# Altium PCB QCW MMC PCBA.PcbDoc
Units mm, origin at the board's own origin, x right, y up, seen from the top; angles counter-clockwise.
Board outline 100 x 90 mm, 2 copper layers (Top Layer, Bottom Layer); 100 components, 58 nets, 264 pads, 84 vias.
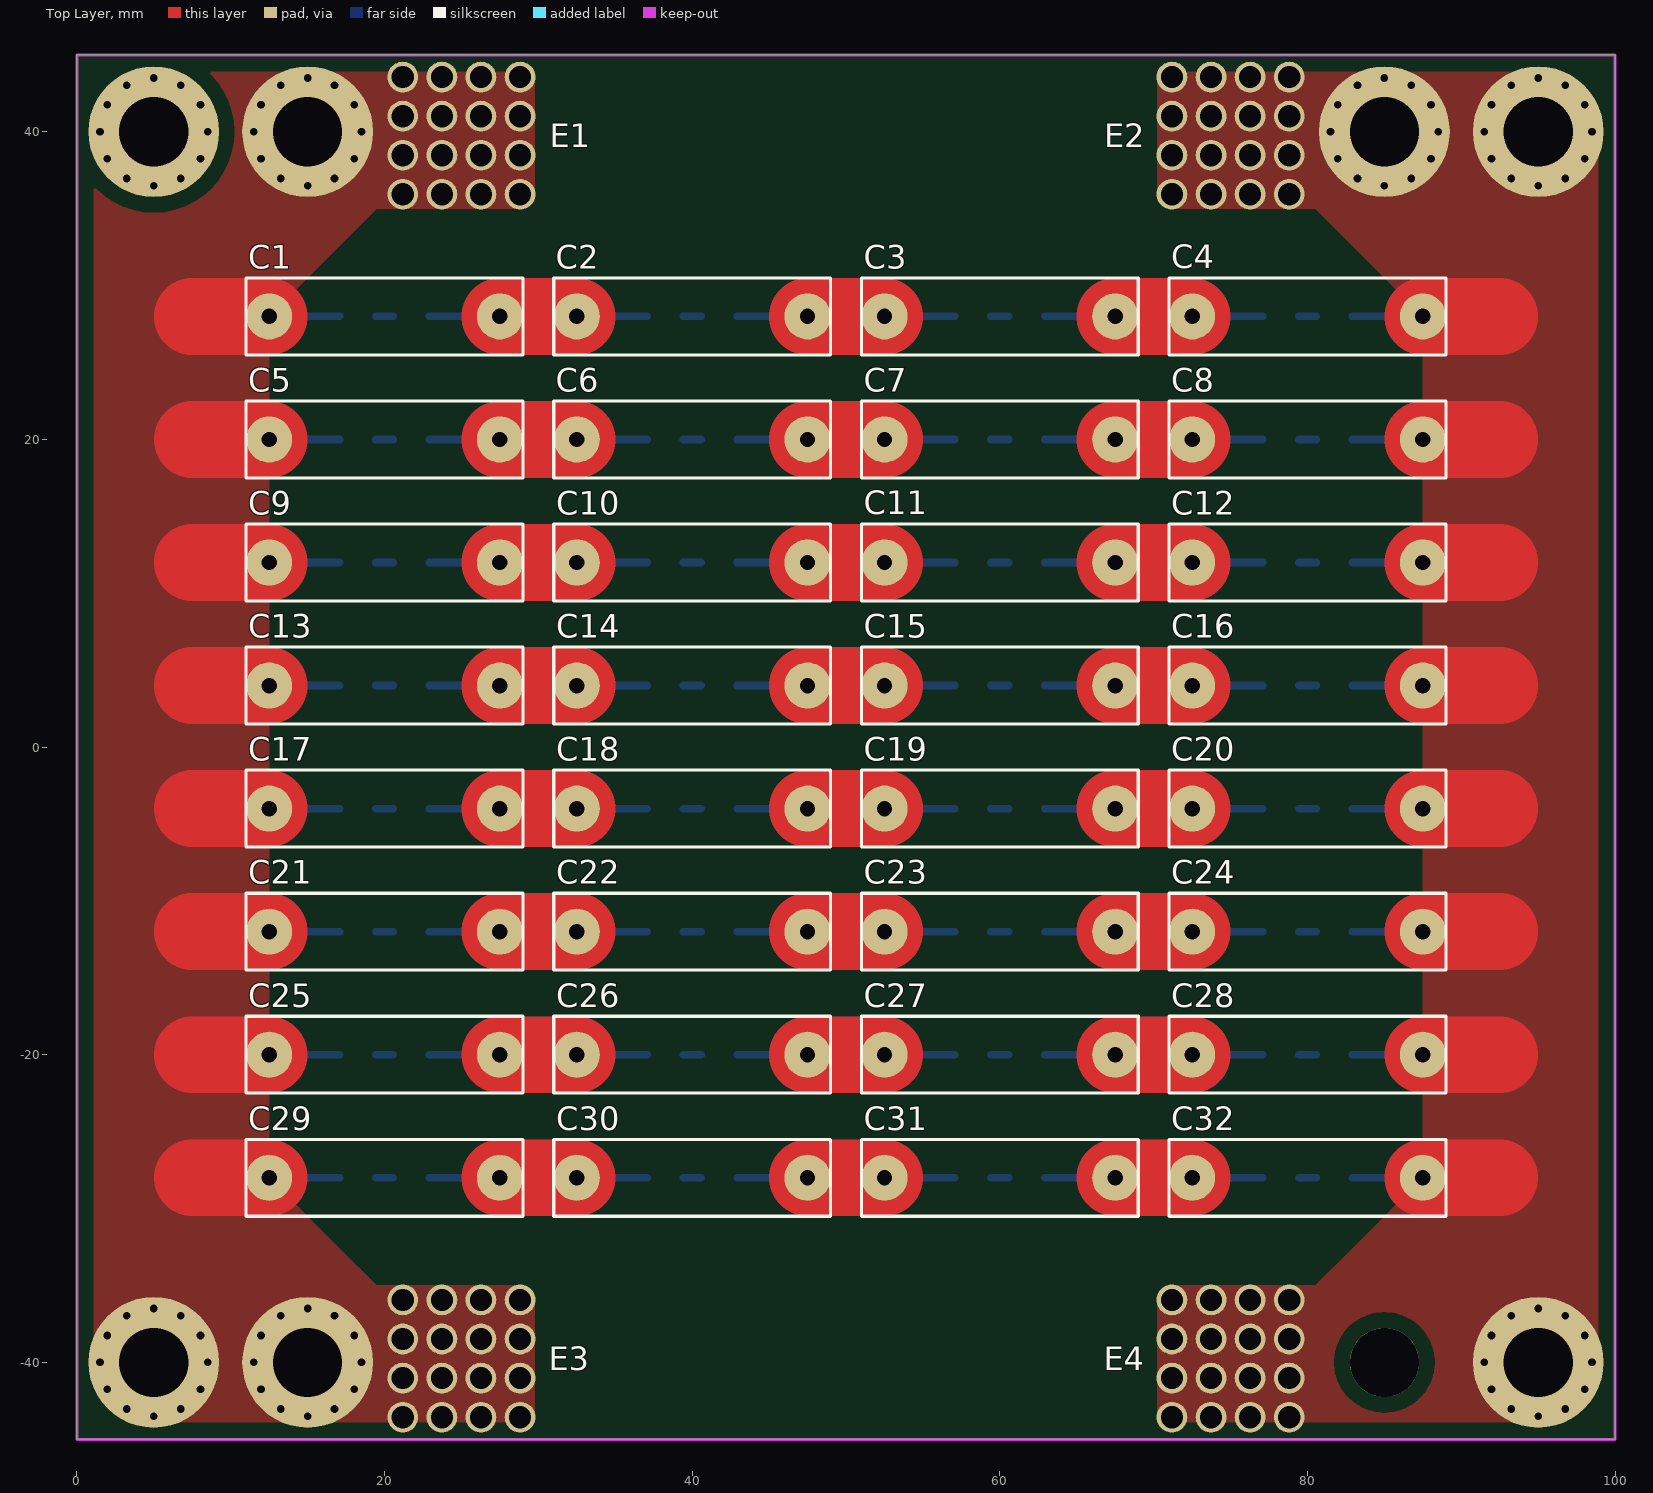
[diagram p0: Top Layer view]
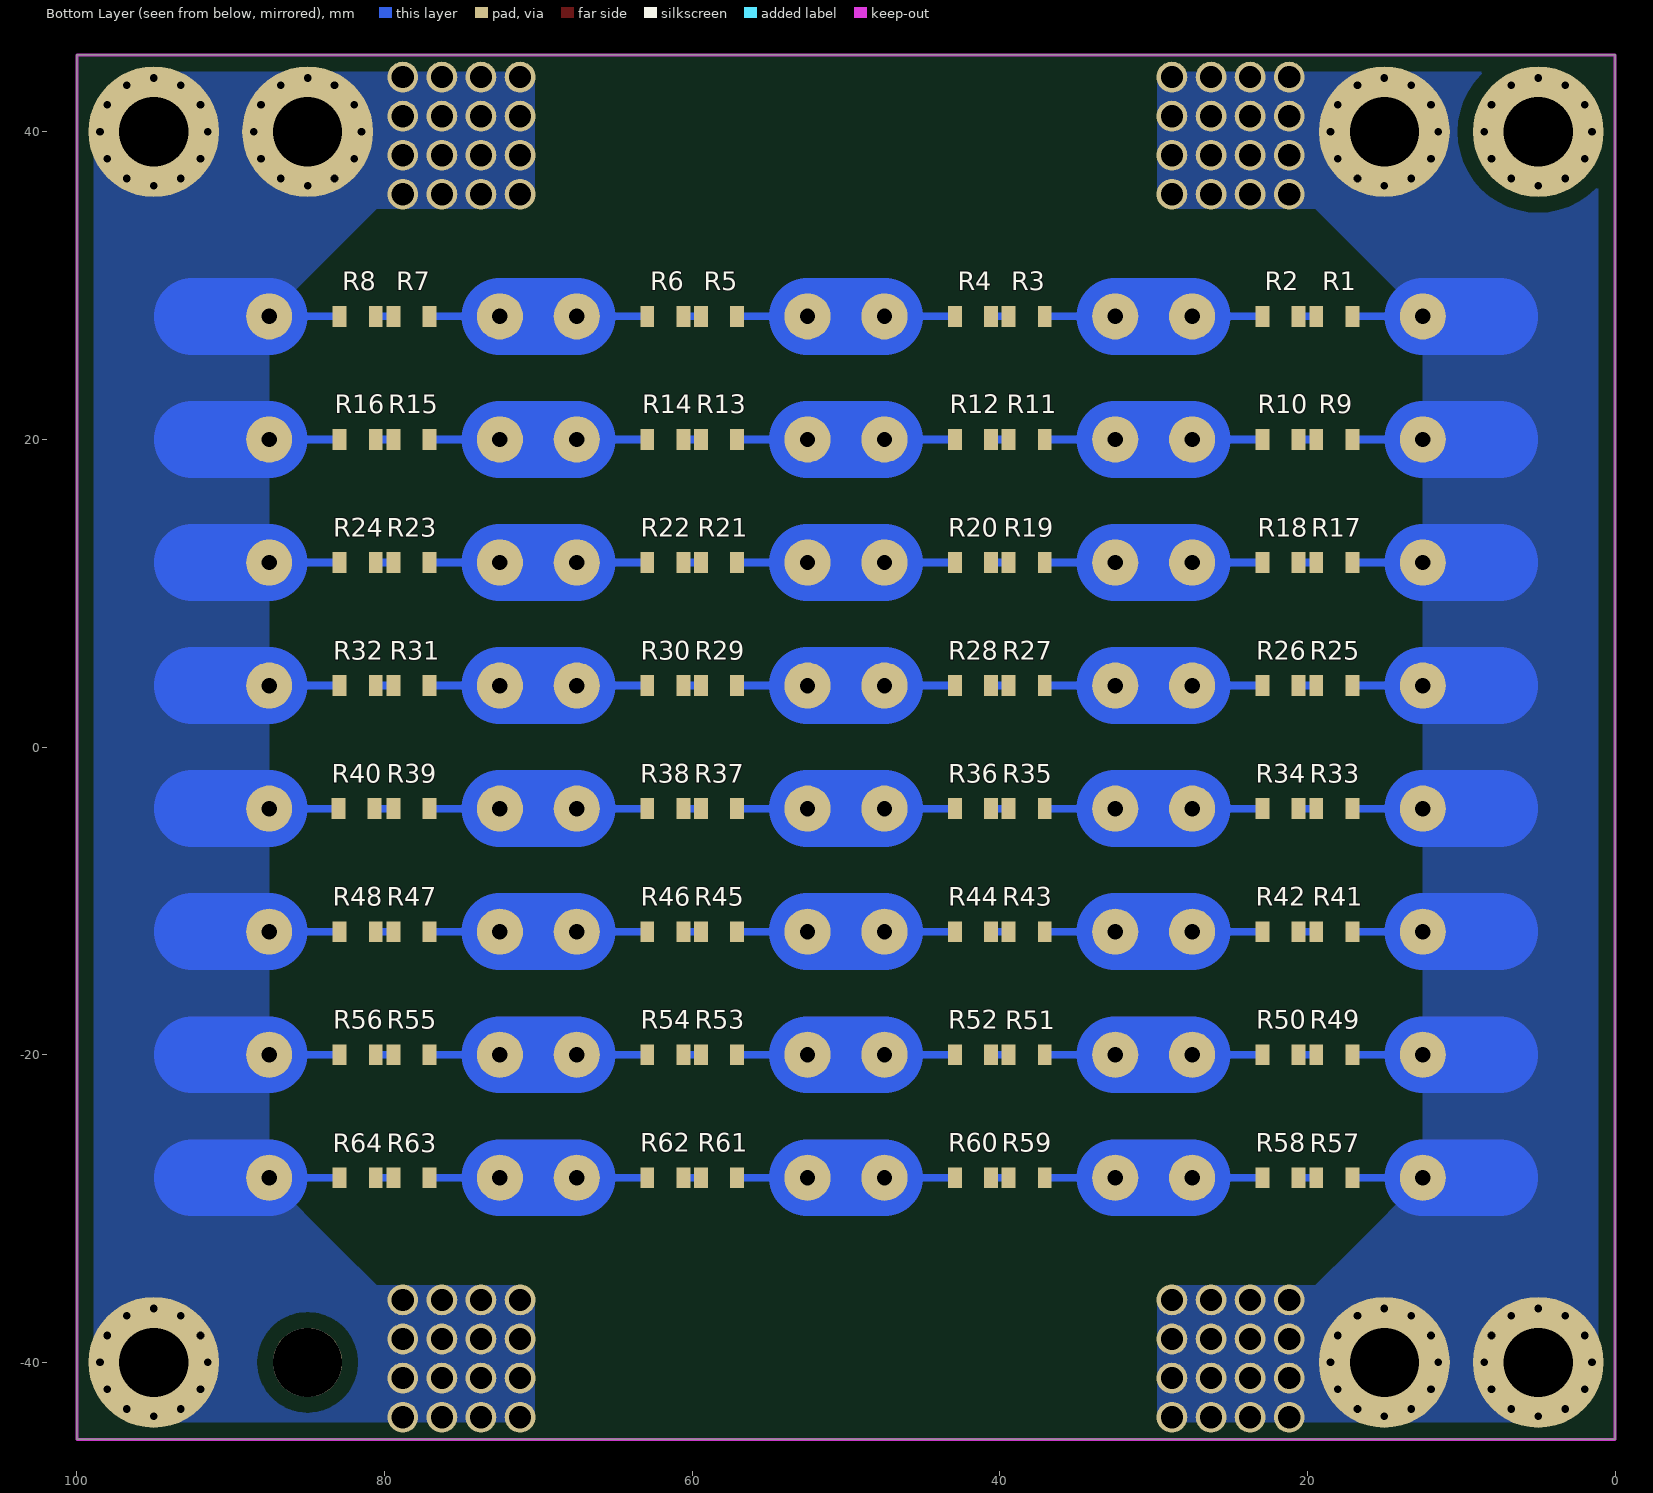
[diagram p1: Bottom Layer view, seen from below]
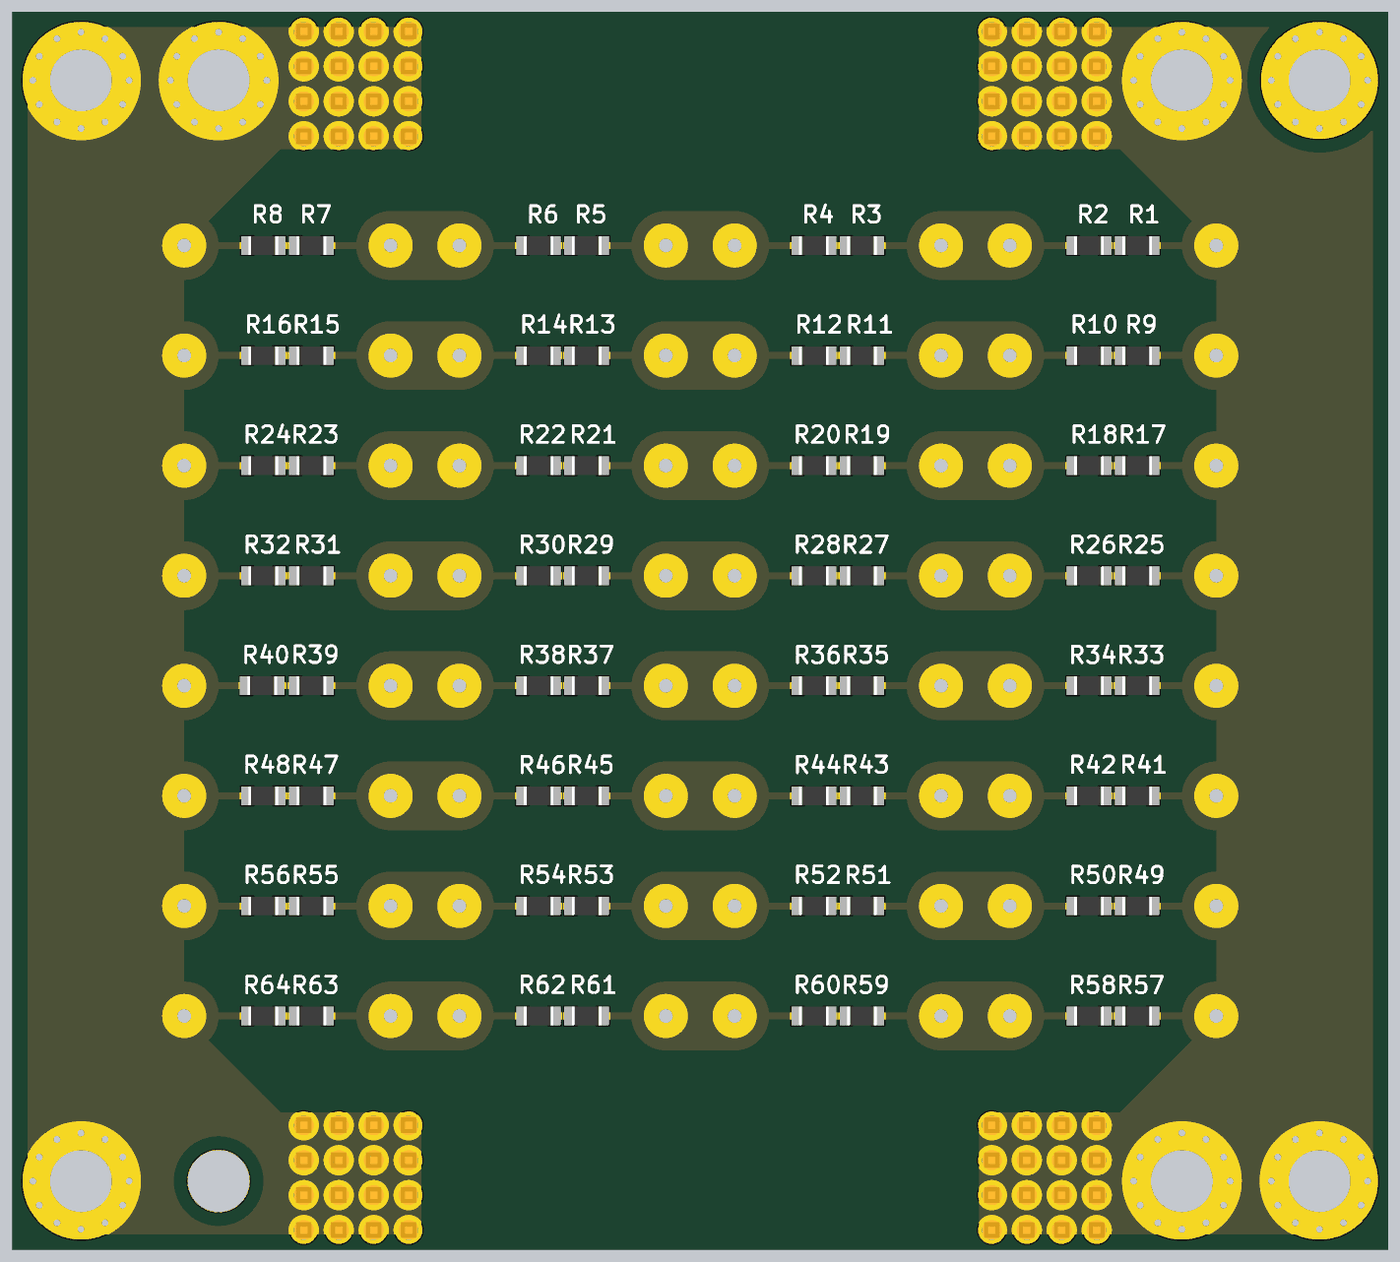
[diagram p2: 3D render of the assembled board from below, using the file's embedded part models]

## Layer stack, top to bottom
Top Solder: solder mask 0.0102, Solder Resist, Dk 3.5
Top Layer: signal copper 0.0356
Dielectric 1: dielectric 0.32, FR-4, Dk 4.8
Bottom Layer: signal copper 0.0356
Bottom Solder: solder mask 0.0102, Solder Resist, Dk 3.5

## Board outline
0,-45 100,-45 100,45 0,45

## Design rules (kind name [scope] priority, off if disabled: settings)
Clearance [InPolygon] p1: gap=1 ignorepadtopadclearanceinfootprint=FALSE
Clearance Clearance_1 [All] p2: gap=0.254 ignorepadtopadclearanceinfootprint=FALSE
PolygonConnect [All] p1: connectstyle=Direct reliefconductorwidth=0.254 reliefentries=4 polygonreliefangle="90 Angle" airgapwidth=0.254
RoutingVias [All] p1: holewidth=0.711 width=1.27 viastyle="Through Hole" minholewidth=0.711 minwidth=1.27 maxholewidth=0.711 maxwidth=1.27
SolderMaskExpansion [All] p1: expansion=0.102
Width [All] p1: maxlimit=10 minlimit=0.254 preferedwidth=0.254
30 further rules are at their usual default settings.

## Components (designator, comment, footprint, x,y, rotation, side; value= is the part's Value field where it differs from the comment)
C1 "B32672" "B32672 6n2 1600V" 20,28 r0 top value="6.2nF 1600V"
C2 "B32672" "B32672 6n2 1600V" 40,28 r0 top value="6.2nF 1600V"
C3 "B32672" "B32672 6n2 1600V" 60,28 r0 top value="6.2nF 1600V"
C4 "B32672" "B32672 6n2 1600V" 80,28 r0 top value="6.2nF 1600V"
C5 "B32672" "B32672 6n2 1600V" 20,20 r0 top value="6.2nF 1600V"
C6 "B32672" "B32672 6n2 1600V" 40,20 r0 top value="6.2nF 1600V"
C7 "B32672" "B32672 6n2 1600V" 60,20 r0 top value="6.2nF 1600V"
C8 "B32672" "B32672 6n2 1600V" 80,20 r0 top value="6.2nF 1600V"
C9 "B32672" "B32672 6n2 1600V" 20,12 r0 top value="6.2nF 1600V"
C10 "B32672" "B32672 6n2 1600V" 40,12 r0 top value="6.2nF 1600V"
C11 "B32672" "B32672 6n2 1600V" 60,12 r0 top value="6.2nF 1600V"
C12 "B32672" "B32672 6n2 1600V" 80,12 r0 top value="6.2nF 1600V"
C13 "B32672" "B32672 6n2 1600V" 20,4 r0 top value="6.2nF 1600V"
C14 "B32672" "B32672 6n2 1600V" 40,4 r0 top value="6.2nF 1600V"
C15 "B32672" "B32672 6n2 1600V" 60,4 r0 top value="6.2nF 1600V"
C16 "B32672" "B32672 6n2 1600V" 80,4 r0 top value="6.2nF 1600V"
C17 "B32672" "B32672 6n2 1600V" 20,-4 r0 top value="6.2nF 1600V"
C18 "B32672" "B32672 6n2 1600V" 40,-4 r0 top value="6.2nF 1600V"
C19 "B32672" "B32672 6n2 1600V" 60,-4 r0 top value="6.2nF 1600V"
C20 "B32672" "B32672 6n2 1600V" 80,-4 r0 top value="6.2nF 1600V"
C21 "B32672" "B32672 6n2 1600V" 20,-12 r0 top value="6.2nF 1600V"
C22 "B32672" "B32672 6n2 1600V" 40,-12 r0 top value="6.2nF 1600V"
C23 "B32672" "B32672 6n2 1600V" 60,-12 r0 top value="6.2nF 1600V"
C24 "B32672" "B32672 6n2 1600V" 80,-12 r0 top value="6.2nF 1600V"
C25 "B32672" "B32672 6n2 1600V" 20,-20 r0 top value="6.2nF 1600V"
C26 "B32672" "B32672 6n2 1600V" 40,-20 r0 top value="6.2nF 1600V"
C27 "B32672" "B32672 6n2 1600V" 60,-20 r0 top value="6.2nF 1600V"
C28 "B32672" "B32672 6n2 1600V" 80,-20 r0 top value="6.2nF 1600V"
C29 "B32672" "B32672 6n2 1600V" 20,-28 r0 top value="6.2nF 1600V"
C30 "B32672" "B32672 6n2 1600V" 40,-28 r0 top value="6.2nF 1600V"
C31 "B32672" "B32672 6n2 1600V" 60,-28 r0 top value="6.2nF 1600V"
C32 "B32672" "B32672 6n2 1600V" 80,-28 r0 top value="6.2nF 1600V"
E1 "7461111" "7461111_HAL Surface" 25,39.75 r90 top
E2 "7461111" "7461111_HAL Surface" 75,39.75 r90 top
E3 "7461111" "7461111_HAL Surface" 25,-39.75 r270 top
E4 "7461111" "7461111_HAL Surface" 75,-39.75 r270 top
R1 "HV 1206 Resistor" RES_1206_HV 18.25,28 r0 bottom value=5.1M
R2 "HV 1206 Resistor" RES_1206_HV 21.75,28 r0 bottom value=5.1M
R3 "HV 1206 Resistor" RES_1206_HV 38.25,28 r0 bottom value=5.1M
R4 "HV 1206 Resistor" RES_1206_HV 41.75,28 r0 bottom value=5.1M
R5 "HV 1206 Resistor" RES_1206_HV 58.25,28 r0 bottom value=5.1M
R6 "HV 1206 Resistor" RES_1206_HV 61.75,28 r0 bottom value=5.1M
R7 "HV 1206 Resistor" RES_1206_HV 78.25,28 r0 bottom value=5.1M
R8 "HV 1206 Resistor" RES_1206_HV 81.75,28 r0 bottom value=5.1M
R9 "HV 1206 Resistor" RES_1206_HV 18.25,20 r0 bottom value=5.1M
R10 "HV 1206 Resistor" RES_1206_HV 21.75,20 r0 bottom value=5.1M
R11 "HV 1206 Resistor" RES_1206_HV 38.25,20 r0 bottom value=5.1M
R12 "HV 1206 Resistor" RES_1206_HV 41.75,20 r0 bottom value=5.1M
R13 "HV 1206 Resistor" RES_1206_HV 58.25,20 r0 bottom value=5.1M
R14 "HV 1206 Resistor" RES_1206_HV 61.75,20 r0 bottom value=5.1M
R15 "HV 1206 Resistor" RES_1206_HV 78.25,20 r0 bottom value=5.1M
R16 "HV 1206 Resistor" RES_1206_HV 81.75,20 r0 bottom value=5.1M
R17 "HV 1206 Resistor" RES_1206_HV 18.25,12 r0 bottom value=5.1M
R18 "HV 1206 Resistor" RES_1206_HV 21.75,12 r0 bottom value=5.1M
R19 "HV 1206 Resistor" RES_1206_HV 38.25,12 r0 bottom value=5.1M
R20 "HV 1206 Resistor" RES_1206_HV 41.75,12 r0 bottom value=5.1M
R21 "HV 1206 Resistor" RES_1206_HV 58.25,12 r0 bottom value=5.1M
R22 "HV 1206 Resistor" RES_1206_HV 61.75,12 r0 bottom value=5.1M
R23 "HV 1206 Resistor" RES_1206_HV 78.25,12 r0 bottom value=5.1M
R24 "HV 1206 Resistor" RES_1206_HV 81.75,12 r0 bottom value=5.1M
R25 "HV 1206 Resistor" RES_1206_HV 18.25,4 r0 bottom value=5.1M
R26 "HV 1206 Resistor" RES_1206_HV 21.75,4 r0 bottom value=5.1M
R27 "HV 1206 Resistor" RES_1206_HV 38.25,4 r0 bottom value=5.1M
R28 "HV 1206 Resistor" RES_1206_HV 41.75,4 r0 bottom value=5.1M
R29 "HV 1206 Resistor" RES_1206_HV 58.25,4 r0 bottom value=5.1M
R30 "HV 1206 Resistor" RES_1206_HV 61.75,4 r0 bottom value=5.1M
R31 "HV 1206 Resistor" RES_1206_HV 78.25,4 r0 bottom value=5.1M
R32 "HV 1206 Resistor" RES_1206_HV 81.75,4 r0 bottom value=5.1M
R33 "HV 1206 Resistor" RES_1206_HV 18.25,-4 r0 bottom value=5.1M
R34 "HV 1206 Resistor" RES_1206_HV 21.75,-4 r0 bottom value=5.1M
R35 "HV 1206 Resistor" RES_1206_HV 38.25,-4 r0 bottom value=5.1M
R36 "HV 1206 Resistor" RES_1206_HV 41.75,-4 r0 bottom value=5.1M
R37 "HV 1206 Resistor" RES_1206_HV 58.25,-4 r0 bottom value=5.1M
R38 "HV 1206 Resistor" RES_1206_HV 61.75,-4 r0 bottom value=5.1M
R39 "HV 1206 Resistor" RES_1206_HV 78.25,-4 r0 bottom value=5.1M
R40 "HV 1206 Resistor" RES_1206_HV 81.825,-4 r0 bottom value=5.1M
R41 "HV 1206 Resistor" RES_1206_HV 18.25,-12 r0 bottom value=5.1M
R42 "HV 1206 Resistor" RES_1206_HV 21.75,-12 r0 bottom value=5.1M
R43 "HV 1206 Resistor" RES_1206_HV 38.25,-12 r0 bottom value=5.1M
R44 "HV 1206 Resistor" RES_1206_HV 41.75,-12 r0 bottom value=5.1M
R45 "HV 1206 Resistor" RES_1206_HV 58.25,-12 r0 bottom value=5.1M
R46 "HV 1206 Resistor" RES_1206_HV 61.75,-12 r0 bottom value=5.1M
R47 "HV 1206 Resistor" RES_1206_HV 78.25,-12 r0 bottom value=5.1M
R48 "HV 1206 Resistor" RES_1206_HV 81.75,-12 r0 bottom value=5.1M
R49 "HV 1206 Resistor" RES_1206_HV 18.25,-20 r0 bottom value=5.1M
R50 "HV 1206 Resistor" RES_1206_HV 21.75,-20 r0 bottom value=5.1M
R51 "HV 1206 Resistor" RES_1206_HV 38.25,-20 r0 bottom value=5.1M
R52 "HV 1206 Resistor" RES_1206_HV 41.75,-20 r0 bottom value=5.1M
R53 "HV 1206 Resistor" RES_1206_HV 58.25,-20 r0 bottom value=5.1M
R54 "HV 1206 Resistor" RES_1206_HV 61.75,-20 r0 bottom value=5.1M
R55 "HV 1206 Resistor" RES_1206_HV 78.25,-20 r0 bottom value=5.1M
R56 "HV 1206 Resistor" RES_1206_HV 81.75,-20 r0 bottom value=5.1M
R57 "HV 1206 Resistor" RES_1206_HV 18.25,-28 r0 bottom value=5.1M
R58 "HV 1206 Resistor" RES_1206_HV 21.75,-28 r0 bottom value=5.1M
R59 "HV 1206 Resistor" RES_1206_HV 38.25,-28 r0 bottom value=5.1M
R60 "HV 1206 Resistor" RES_1206_HV 41.75,-28 r0 bottom value=5.1M
R61 "HV 1206 Resistor" RES_1206_HV 58.25,-28 r0 bottom value=5.1M
R62 "HV 1206 Resistor" RES_1206_HV 61.75,-28 r0 bottom value=5.1M
R63 "HV 1206 Resistor" RES_1206_HV 78.25,-28 r0 bottom value=5.1M
R64 "HV 1206 Resistor" RES_1206_HV 81.75,-28 r0 bottom value=5.1M

## Footprints (in the part's own frame and the unit in brackets; to place one, negate y for a bottom-side part, rotate by r counter-clockwise, add the part's x,y. Pads: shape width x height; smd on the part's side, far side on the other; paste and mask are expansions set on the pad)
"7461111_HAL Surface" [mm] "M4, thr 5mm"
  round 2 hole 1.45: 1(-3.81,-3.81) 1(-3.81,-1.27) 1(-3.81,1.27) 1(-3.81,3.81) 1(-1.27,3.81) 1(-1.27,-1.27) 1(-1.27,1.27) 1(-1.27,-3.81) 1(1.27,3.81) 1(1.27,-1.27) 1(1.27,1.27) 1(1.27,-3.81) 1(3.81,-3.81) 1(3.81,-1.27) 1(3.81,1.27) 1(3.81,3.81)
  body extent -4.5,-4.5 4.5,4.5, height 14
"B32672 6n2 1600V" [mm]
  round 3 hole 1: 1(-7.5,0) 2(7.5,0)
  silkscreen extent -9,-2.5 9,2.5, body extent -9,-2.5 9,2.5, height 10.5
RES_1206_HV [mm] "Chip Resistor, 2-Leads, Body 2.00x1.25mm, IPC Medium Density"
  rect 0.9x1.35 smd: 1(-1.175,0) 2(1.175,0)
  body extent -1.07,-0.67 1.07,0.67, height 0.65

## Part data
C1 C2 C3 C4 C5 C6 C7 C8 C9 C10 C11 C12 C13 C14 C15 C16 C17 C18 C19 C20 C21 C22 C23 C24 C25 C26 C27 C28 C29 C30 C31 C32: library part Cap, "Capacitor", LatestRevisionDate=17-Jul-2002, LatestRevisionNote="Re-released for DXP Platform.", PackageDescription="Radial Cap, Thru-Hole; 2 Leads; 0.3 in Pin Spacing", PackageReference=RAD-0.3, Published=8-Jun-2000, Publisher="Altium Limited"
E1 E2 E3 E4: library part "WP-RAFU,  7461111", "WP-RAFU 90° with Full Plain Pin Plate, M4, thr 5mm", Manufacturer="Wurth Elektronik", ComponentLink1Description=Manufacturer, ComponentLink1URL=http://www.we-online.de, ComponentLink2Description=Datasheet, ComponentLink2URL=http://katalog.we-online.de/em/datasheet/7461111.pdf, Created by="Baojun Chen", Created Date=Dec.2015, partNo=7461111
R1 R2 R3 R4 R5 R6 R7 R8 R9 R10 R11 R12 R13 R14 R15 R16 R17 R18 R19 R20 R21 R22 R23 R24 R25 R26 R27 R28 R29 R30 R31 R32 R33 R34 R35 R36 R37 R38 R39 R40 R41 R42 R43 R44 R45 R46 R47 R48 R49 R50 R51 R52 R53 R54 R55 R56 R57 R58 R59 R60 R61 R62 R63 R64: library part Res3, "Resistor", LatestRevisionDate=29-May-2009, LatestRevisionNote="IPC-7351 Footprint Added.", PackageDescription="Chip Resistor", PackageReference=J1-0603, Published=8-Jun-2000, Publisher="Altium Limited"

## Free pads (board coordinates)
  round 8.5 hole 4.5: 0(5,-40) 0(5,40) 0(15,-40) 0(15,40) 0(85,40) 0(95,-40) 0(95,40)
  round 4.5 hole 4.5: 0(85,-40)

## Via types
v1: diameter 1, hole 0.5, Top Layer to Bottom Layer, 84 vias

## Nets (pads, with @x,y where several pads share a name; then routed paths per layer and width w, separated by ;. In a path a pad name is that pad's centre, name@x,y a point inside that pad or via, vN(x,y) a via of type N, cw(c..) or ccw(c..) an arc to the next point about the centre after c; other vN are vias at no path point)
MMC_A: C1.1 C5.1 C9.1 C13.1 C17.1 C21.1 C25.1 C29.1 E1.1 E3.1 pad.0@5,-40 pad.0@15,40 pad.0@15,-40 R1.1 R9.1 R17.1 R25.1 R33.1 R41.1 R49.1 R57.1 | length 96.6
  Top Layer w5: 7.5,-28 C29.1 ; 7.5,-20 C25.1 ; 7.5,-12 C21.1 ; 7.5,-4 C17.1 ; 7.5,4 C13.1 ; 7.5,12 C9.1 ; 7.5,20 C5.1 ; 7.5,28 C1.1
  Bottom Layer w0.5: 15,-28 R57.1 ; 15,-20 R49.1 ; 15,-12 R41.1 ; 15,-4 R33.1 ; 15,4 R25.1 ; 15,12 R17.1 ; 15,20 R9.1 ; 15,28 R1.1
  Bottom Layer w5: 7.5,-28 C29.1 ; 7.5,-20 C25.1 ; 7.5,-12 C21.1 ; 7.5,-4 C17.1 ; 7.5,4 C13.1 ; 7.5,12 C9.1 ; 7.5,20 C5.1 ; 7.5,28 C1.1
  other v1: 5,-43.5 15,-43.5 3.25,-43.031 6.75,-43.031 13.25,-43.031 16.75,-43.031 1.969,-41.75 8.031,-41.75 11.969,-41.75 18.031,-41.75 1.5,-40 8.5,-40 11.5,-40 18.5,-40 1.969,-38.25 8.031,-38.25 11.969,-38.25 18.031,-38.25 3.25,-36.969 6.75,-36.969 13.25,-36.969 16.75,-36.969 5,-36.5 15,-36.5 15,36.5 13.25,36.969 16.75,36.969 11.969,38.25 18.031,38.25 11.5,40 18.5,40 11.969,41.75 18.031,41.75 13.25,43.031 16.75,43.031 15,43.5
MMC_B: C4.2 C8.2 C12.2 C16.2 C20.2 C24.2 C28.2 C32.2 E2.1 E4.1 pad.0@85,40 pad.0@95,40 pad.0@95,-40 R8.2 R16.2 R24.2 R32.2 R40.2 R48.2 R56.2 R64.2 | length 96.6
  Top Layer w5: C32.2 92.5,-28 ; C28.2 92.5,-20 ; C24.2 92.5,-12 ; C20.2 92.5,-4 ; C16.2 92.5,4 ; C12.2 92.5,12 ; C8.2 92.5,20 ; C4.2 92.5,28
  Bottom Layer w0.5: R64.2 85,-28 ; R56.2 85,-20 ; R48.2 85,-12 ; R40.2@82.925,-4 85,-4 ; R32.2 85,4 ; R24.2 85,12 ; R16.2 85,20 ; R8.2 85,28
  Bottom Layer w5: C32.2 92.5,-28 ; C28.2 92.5,-20 ; C24.2 92.5,-12 ; C20.2 92.5,-4 ; C16.2 92.5,4 ; C12.2 92.5,12 ; C8.2 92.5,20 ; C4.2 92.5,28
  other v1: 95,-43.5 93.25,-43.031 96.75,-43.031 91.969,-41.75 98.031,-41.75 91.5,-40 98.5,-40 91.969,-38.25 98.031,-38.25 93.25,-36.969 96.75,-36.969 95,-36.5 85,36.5 95,36.5 83.25,36.969 86.75,36.969 93.25,36.969 96.75,36.969 81.969,38.25 88.031,38.25 91.969,38.25 98.031,38.25 81.5,40 88.5,40 91.5,40 98.5,40 81.969,41.75 88.031,41.75 91.969,41.75 98.031,41.75 83.25,43.031 86.75,43.031 93.25,43.031 96.75,43.031 85,43.5 95,43.5
NetC1_2: C1.2 C2.1 R2.2 R3.1 | length 14.1
  Top Layer w5: C1.2 C2.1
  Bottom Layer w0.5: R2.2 25,28 ; 35,28 R3.1
  Bottom Layer w5: C1.2 C2.1
NetC2_2: C2.2 C3.1 R4.2 R5.1 | length 14.1
  Top Layer w5: C2.2 C3.1
  Bottom Layer w0.5: R4.2 45,28 ; 55,28 R5.1
  Bottom Layer w5: C2.2 C3.1
NetC3_2: C3.2 C4.1 R6.2 R7.1 | length 14.1
  Top Layer w5: C3.2 C4.1
  Bottom Layer w0.5: R6.2 65,28 ; 75,28 R7.1
  Bottom Layer w5: C3.2 C4.1
NetC5_2: C5.2 C6.1 R10.2 R11.1 | length 14.1
  Top Layer w5: C5.2 C6.1
  Bottom Layer w0.5: R10.2 25,20 ; 35,20 R11.1
  Bottom Layer w5: C5.2 C6.1
NetC6_2: C6.2 C7.1 R12.2 R13.1 | length 14.1
  Top Layer w5: C6.2 C7.1
  Bottom Layer w0.5: R12.2 45,20 ; 55,20 R13.1
  Bottom Layer w5: C6.2 C7.1
NetC7_2: C7.2 C8.1 R14.2 R15.1 | length 14.1
  Top Layer w5: C7.2 C8.1
  Bottom Layer w0.5: R14.2 65,20 ; 75,20 R15.1
  Bottom Layer w5: C7.2 C8.1
NetC9_2: C9.2 C10.1 R18.2 R19.1 | length 14.1
  Top Layer w5: C9.2 C10.1
  Bottom Layer w0.5: R18.2 25,12 ; 35,12 R19.1
  Bottom Layer w5: C9.2 C10.1
NetC10_2: C10.2 C11.1 R20.2 R21.1 | length 14.1
  Top Layer w5: C10.2 C11.1
  Bottom Layer w0.5: R20.2 45,12 ; 55,12 R21.1
  Bottom Layer w5: C10.2 C11.1
NetC11_2: C11.2 C12.1 R22.2 R23.1 | length 14.1
  Top Layer w5: C11.2 C12.1
  Bottom Layer w0.5: R22.2 65,12 ; 75,12 R23.1
  Bottom Layer w5: C11.2 C12.1
NetC13_2: C13.2 C14.1 R26.2 R27.1 | length 14.1
  Top Layer w5: C13.2 C14.1
  Bottom Layer w0.5: R26.2 25,4 ; 35,4 R27.1
  Bottom Layer w5: C13.2 C14.1
NetC14_2: C14.2 C15.1 R28.2 R29.1 | length 14.1
  Top Layer w5: C14.2 C15.1
  Bottom Layer w0.5: R28.2 45,4 ; 55,4 R29.1
  Bottom Layer w5: C14.2 C15.1
NetC15_2: C15.2 C16.1 R30.2 R31.1 | length 14.1
  Top Layer w5: C15.2 C16.1
  Bottom Layer w0.5: R30.2 65,4 ; 75,4 R31.1
  Bottom Layer w5: C15.2 C16.1
NetC17_2: C17.2 C18.1 R34.2 R35.1 | length 14.1
  Top Layer w5: C17.2 C18.1
  Bottom Layer w0.5: R34.2 25,-4 ; 35,-4 R35.1
  Bottom Layer w5: C17.2 C18.1
NetC18_2: C18.2 C19.1 R36.2 R37.1 | length 14.1
  Top Layer w5: C18.2 C19.1
  Bottom Layer w0.5: R36.2 45,-4 ; 55,-4 R37.1
  Bottom Layer w5: C18.2 C19.1
NetC19_2: C19.2 C20.1 R38.2 R39.1 | length 14.1
  Top Layer w5: C19.2 C20.1
  Bottom Layer w0.5: R38.2 65,-4 ; 75,-4 R39.1
  Bottom Layer w5: C19.2 C20.1
NetC21_2: C21.2 C22.1 R42.2 R43.1 | length 14.1
  Top Layer w5: C21.2 C22.1
  Bottom Layer w0.5: R42.2 25,-12 ; 35,-12 R43.1
  Bottom Layer w5: C21.2 C22.1
NetC22_2: C22.2 C23.1 R44.2 R45.1 | length 14.1
  Top Layer w5: C22.2 C23.1
  Bottom Layer w0.5: R44.2 45,-12 ; 55,-12 R45.1
  Bottom Layer w5: C22.2 C23.1
NetC23_2: C23.2 C24.1 R46.2 R47.1 | length 14.1
  Top Layer w5: C23.2 C24.1
  Bottom Layer w0.5: R46.2 65,-12 ; 75,-12 R47.1
  Bottom Layer w5: C23.2 C24.1
NetC25_2: C25.2 C26.1 R50.2 R51.1 | length 14.1
  Top Layer w5: C25.2 C26.1
  Bottom Layer w0.5: R50.2 25,-20 ; 35,-20 R51.1
  Bottom Layer w5: C25.2 C26.1
NetC26_2: C26.2 C27.1 R52.2 R53.1 | length 14.1
  Top Layer w5: C26.2 C27.1
  Bottom Layer w0.5: R52.2 45,-20 ; 55,-20 R53.1
  Bottom Layer w5: C26.2 C27.1
NetC27_2: C27.2 C28.1 R54.2 R55.1 | length 14.1
  Top Layer w5: C27.2 C28.1
  Bottom Layer w0.5: R54.2 65,-20 ; 75,-20 R55.1
  Bottom Layer w5: C27.2 C28.1
NetC29_2: C29.2 C30.1 R58.2 R59.1 | length 14.1
  Top Layer w5: C29.2 C30.1
  Bottom Layer w0.5: R58.2 25,-28 ; 35,-28 R59.1
  Bottom Layer w5: C29.2 C30.1
NetC30_2: C30.2 C31.1 R60.2 R61.1 | length 14.1
  Top Layer w5: C30.2 C31.1
  Bottom Layer w0.5: R60.2 45,-28 ; 55,-28 R61.1
  Bottom Layer w5: C30.2 C31.1
NetC31_2: C31.2 C32.1 R62.2 R63.1 | length 14.1
  Top Layer w5: C31.2 C32.1
  Bottom Layer w0.5: R62.2 65,-28 ; 75,-28 R63.1
  Bottom Layer w5: C31.2 C32.1
NetR1_2: R1.2 R2.1 | length 1.2
  Bottom Layer w0.5: R1.2 R2.1
NetR3_2: R3.2 R4.1 | length 1.2
  Bottom Layer w0.5: R3.2 R4.1
NetR5_2: R5.2 R6.1 | length 1.2
  Bottom Layer w0.5: R5.2 R6.1
NetR7_2: R7.2 R8.1 | length 1.2
  Bottom Layer w0.5: R7.2 R8.1
NetR9_2: R9.2 R10.1 | length 1.2
  Bottom Layer w0.5: R9.2 R10.1
NetR11_2: R11.2 R12.1 | length 1.2
  Bottom Layer w0.5: R11.2 R12.1
NetR13_2: R13.2 R14.1 | length 1.2
  Bottom Layer w0.5: R13.2 R14.1
NetR15_2: R15.2 R16.1 | length 1.2
  Bottom Layer w0.5: R15.2 R16.1
NetR17_2: R17.2 R18.1 | length 1.2
  Bottom Layer w0.5: R17.2 R18.1
NetR19_2: R19.2 R20.1 | length 1.2
  Bottom Layer w0.5: R19.2 R20.1
NetR21_2: R21.2 R22.1 | length 1.2
  Bottom Layer w0.5: R21.2 R22.1
NetR23_2: R23.2 R24.1 | length 1.2
  Bottom Layer w0.5: R23.2 R24.1
NetR25_2: R25.2 R26.1 | length 1.2
  Bottom Layer w0.5: R25.2 R26.1
NetR27_2: R27.2 R28.1 | length 1.2
  Bottom Layer w0.5: R27.2 R28.1
NetR29_2: R29.2 R30.1 | length 1.2
  Bottom Layer w0.5: R29.2 R30.1
NetR31_2: R31.2 R32.1 | length 1.2
  Bottom Layer w0.5: R31.2 R32.1
NetR33_2: R33.2 R34.1 | length 1.2
  Bottom Layer w0.5: R33.2 R34.1
NetR35_2: R35.2 R36.1 | length 1.2
  Bottom Layer w0.5: R35.2 R36.1
NetR37_2: R37.2 R38.1 | length 1.2
  Bottom Layer w0.5: R37.2 R38.1
NetR39_2: R39.2 R40.1 | length 1.2
  Bottom Layer w0.5: R39.2 R40.1@80.575,-4
NetR41_2: R41.2 R42.1 | length 1.2
  Bottom Layer w0.5: R41.2 R42.1
NetR43_2: R43.2 R44.1 | length 1.2
  Bottom Layer w0.5: R43.2 R44.1
NetR45_2: R45.2 R46.1 | length 1.2
  Bottom Layer w0.5: R45.2 R46.1
NetR47_2: R47.2 R48.1 | length 1.2
  Bottom Layer w0.5: R47.2 R48.1
NetR49_2: R49.2 R50.1 | length 1.2
  Bottom Layer w0.5: R49.2 R50.1
NetR51_2: R51.2 R52.1 | length 1.2
  Bottom Layer w0.5: R51.2 R52.1
NetR53_2: R53.2 R54.1 | length 1.2
  Bottom Layer w0.5: R53.2 R54.1
NetR55_2: R55.2 R56.1 | length 1.2
  Bottom Layer w0.5: R55.2 R56.1
NetR57_2: R57.2 R58.1 | length 1.2
  Bottom Layer w0.5: R57.2 R58.1
NetR59_2: R59.2 R60.1 | length 1.2
  Bottom Layer w0.5: R59.2 R60.1
NetR61_2: R61.2 R62.1 | length 1.2
  Bottom Layer w0.5: R61.2 R62.1
NetR63_2: R63.2 R64.1 | length 1.2
  Bottom Layer w0.5: R63.2 R64.1
copper on no net:
  other v1: 5,36.5 3.25,36.969 6.75,36.969 1.969,38.25 8.031,38.25 1.5,40 8.5,40 1.969,41.75 8.031,41.75 3.25,43.031 6.75,43.031 5,43.5

## Polygon pours and split planes (outlines as drawn)
MMC_B on Top Layer "MMC_B_L01_P012" (solid, remove dead copper, pour order 12): 83,32.5 80.5,35 71,35 70.25,35.75 70.25,43.5 71,44.25 95,44.25 99.25,40 99.25,-40 95,-44.25 71,-44.25 70.25,-43.5 70.25,-35.75 71,-35 80.5,-35 83,-32.5 87.5,-28 87.5,28
MMC_A on Top Layer "MMC_A_L01_P010" (solid, remove dead copper, pour order 10): 17,-32.5 19.5,-35 29,-35 29.75,-35.75 29.75,-43.5 29,-44.25 5,-44.25 0.75,-40 0.75,40 5,44.25 29,44.25 29.75,43.5 29.75,35.75 29,35 19.5,35 17,32.5 12.5,28 12.5,-28
MMC_B on Bottom Layer "MMC_B_L02_P014" (solid, remove dead copper, pour order 14): 83,32.5 80.5,35 71,35 70.25,35.75 70.25,43.5 71,44.25 95,44.25 99.25,40 99.25,-40 95,-44.25 71,-44.25 70.25,-43.5 70.25,-35.75 71,-35 80.5,-35 83,-32.5 87.5,-28 87.5,28
MMC_A on Bottom Layer "MMC_A_L02_P008" (solid, remove dead copper, pour order 8): 17,-32.5 19.5,-35 29,-35 29.75,-35.75 29.75,-43.5 29,-44.25 5,-44.25 0.75,-40 0.75,40 5,44.25 29,44.25 29.75,43.5 29.75,35.75 29,35 19.5,35 17,32.5 12.5,28 12.5,-28

## Keep-outs
Keep-Out Layer:
  the board outline again, w0.2

## Silkscreen, mask and mechanical layers (free items; w line width, h text height)
Board Outline:
  the board outline again, w0.2

## Text inside footprints (layer, text, board x,y; h text height)
E1: Mechanical 7 "Sn 15um max." at 30.461,37.337 h0.8 r90; Mechanical 7 "Copper 25um-60um" at 31.223,36.702 h0.8 r90
E2: Mechanical 7 "Sn 15um max." at 80.461,37.337 h0.8 r90; Mechanical 7 "Copper 25um-60um" at 81.223,36.702 h0.8 r90
E3: Mechanical 7 "Sn 15um max." at 19.539,-37.337 h0.8 r270; Mechanical 7 "Copper 25um-60um" at 18.777,-36.702 h0.8 r270
E4: Mechanical 7 "Sn 15um max." at 69.539,-37.337 h0.8 r270; Mechanical 7 "Copper 25um-60um" at 68.777,-36.702 h0.8 r270